# Altium PCB PCB2.PcbDoc
Units mil, origin at the board's own origin, x right, y up, seen from the top; angles counter-clockwise.
Board outline 1408.55 x 640 mil, 2 copper layers (Top Layer, Bottom Layer); 14 components, 18 nets, 83 pads, 26 vias.
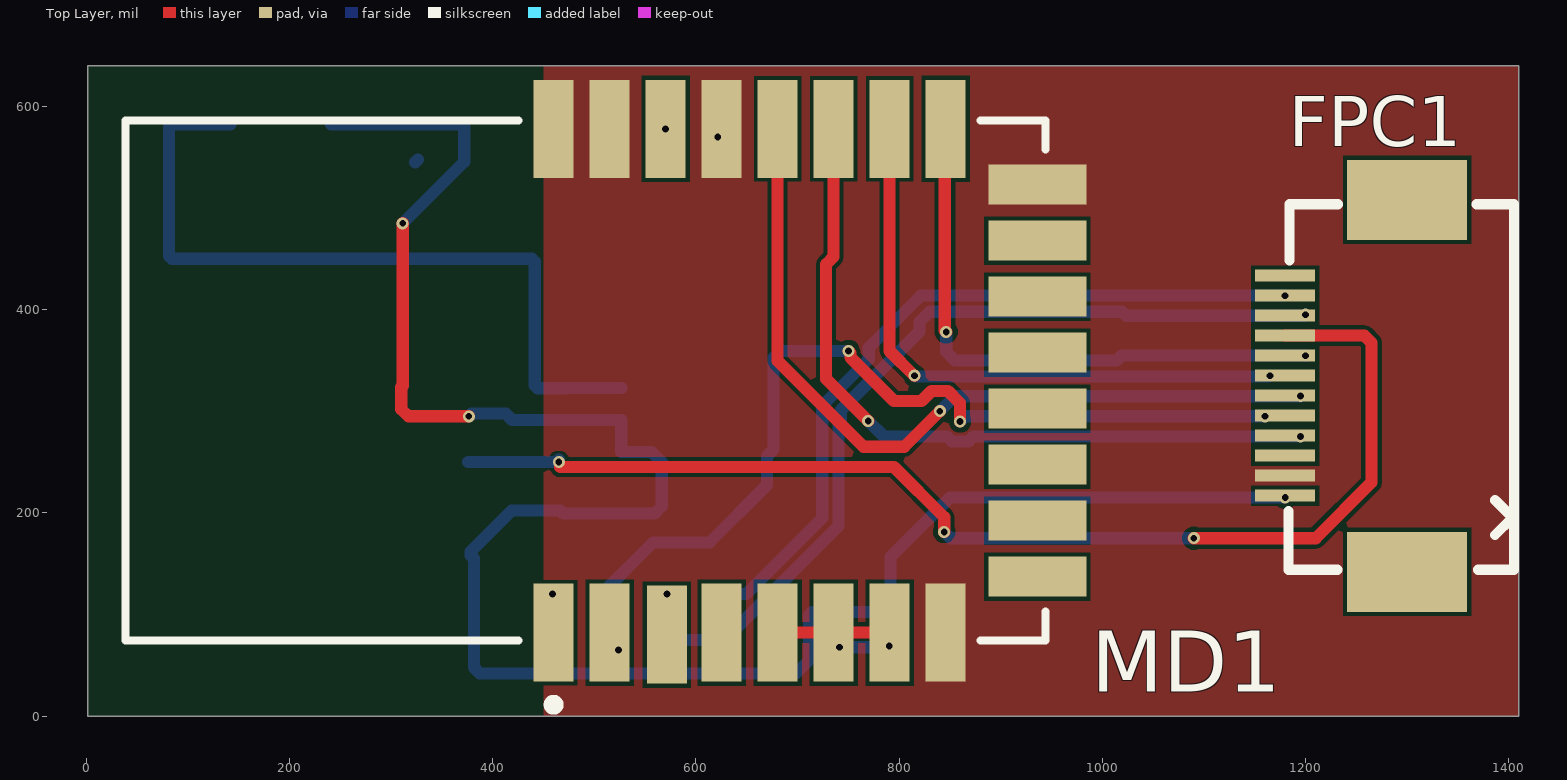
[diagram p0: Top Layer view]
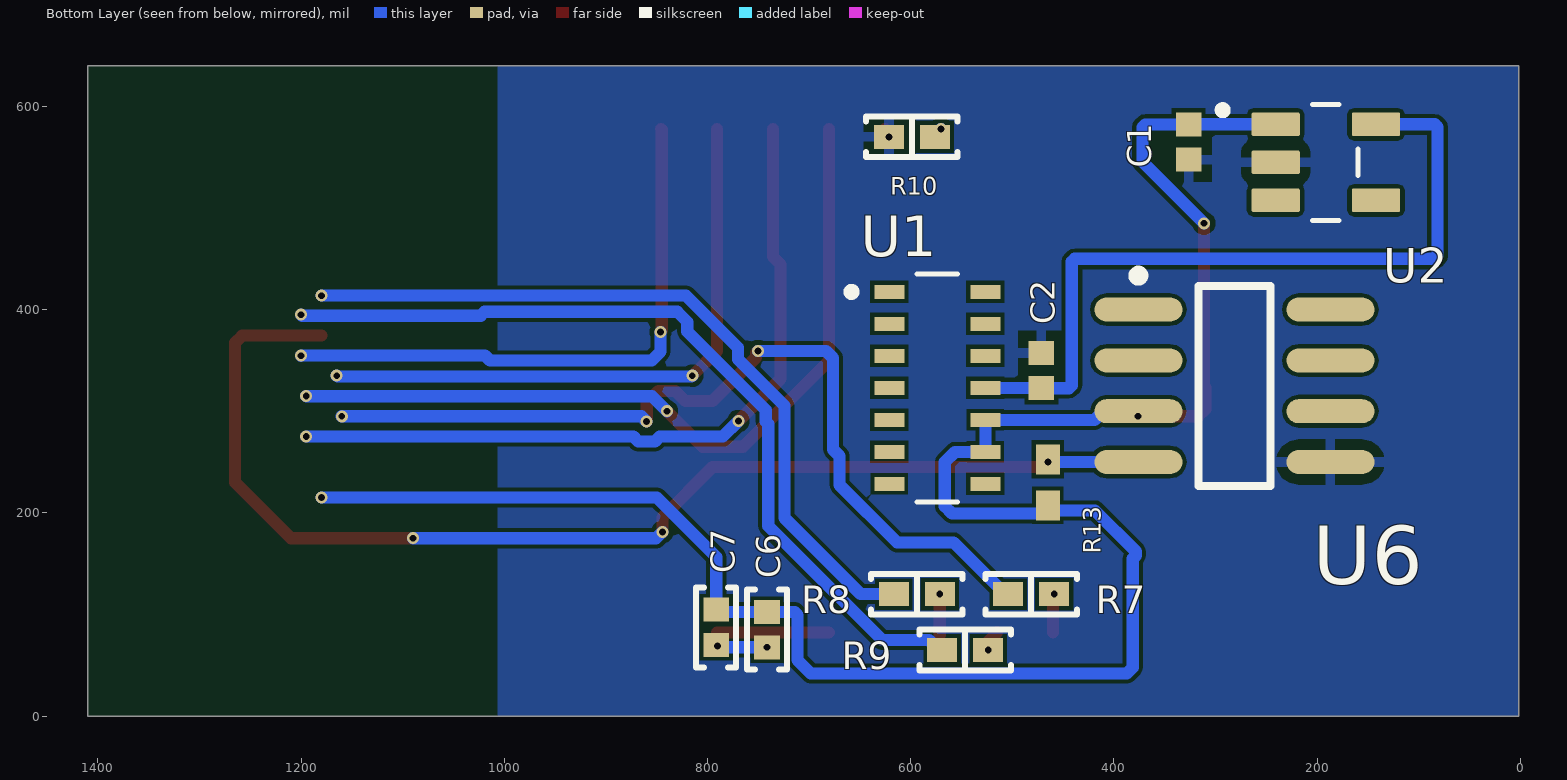
[diagram p1: Bottom Layer view, seen from below]

## Layer stack, top to bottom
Top Solder: solder mask 0.4, Solder Resist, Dk 3.5
Top Layer: signal copper 1.4
Dielectric 1: dielectric 12.6, FR-4, Dk 4.8
Bottom Layer: signal copper 1.4
Bottom Solder: solder mask 0.4, Solder Resist, Dk 3.5

## Board outline
1.45,0 1.45,640 1410,640 1410,0

## Design rules (kind name [scope] priority, off if disabled: settings)
Clearance [All] p1: gap=3.94 ignorepadtopadclearanceinfootprint=TRUE except(5.91: SMDPad-SMDPad SMDPad-THPad SMDPad-Via THPad-THPad THPad-Via Fill-Fill; 7.87: Arc-Via Arc-Hole Track-Via Track-Hole SMDPad-Hole THPad-Hole Via-Via Via-Hole Fill-Hole Poly-Hole Region-Hole Text-Hole; 11.02: Arc-THPad Track-THPad)
ComponentClearance [All] p1: gap=5.91 collisioncheckmode=3 verticalgap=5.91 showdistances=FALSE donotcheckwithout3dbody=TRUE
MinimumSolderMaskSliver [All] p1: minsoldermaskwidth=0
PolygonConnect PolygonConnect_7 [All vs IsNamedPolygon('3V3NRF_L03_P005')] p1: connectstyle=Direct reliefconductorwidth=10 reliefentries=4 polygonreliefangle="90 Angle" airgapwidth=10
PolygonConnect PolygonConnect_6 [All vs IsNamedPolygon('3V3MPU_L03_P006')] p2: connectstyle=Direct reliefconductorwidth=10 reliefentries=4 polygonreliefangle="90 Angle" airgapwidth=10
PolygonConnect PolygonConnect_5 [All vs IsNamedPolygon('3V3MCU_L03_P007')] p3: connectstyle=Direct reliefconductorwidth=10 reliefentries=4 polygonreliefangle="90 Angle" airgapwidth=10
PolygonConnect PolygonConnect_4 [All vs IsNamedPolygon('3V3GE_L03_P004')] p4: connectstyle=Direct reliefconductorwidth=10 reliefentries=4 polygonreliefangle="90 Angle" airgapwidth=10
PolygonConnect PolygonConnect_3 [All vs IsNamedPolygon('GND_L02_P003')] p5: connectstyle=Direct reliefconductorwidth=10 reliefentries=4 polygonreliefangle="90 Angle" airgapwidth=10
PolygonConnect PolygonConnect_2 [All vs IsNamedPolygon('GND_L04_P000')] p6: connectstyle=Direct reliefconductorwidth=10 reliefentries=4 polygonreliefangle="90 Angle" airgapwidth=10
PolygonConnect PolygonConnect_1 [All vs IsNamedPolygon('GND_L01_P001')] p7: connectstyle=Direct reliefconductorwidth=10 reliefentries=4 polygonreliefangle="90 Angle" airgapwidth=10
PolygonConnect [All] p8: connectstyle=Relief reliefconductorwidth=10 reliefentries=4 polygonreliefangle="90 Angle" airgapwidth=10
RoutingVias [All] p1: holewidth=7.87 width=15.75 viastyle="Through Hole" minholewidth=5.91 minwidth=10.63 maxholewidth=6.69 maxwidth=11.81
SilkToSolderMaskClearance [IsPad] p1: minsilkscreentomaskgap=0 clearancetoexposedcopper=FALSE
SolderMaskExpansion SolderMaskExpansion_Via [IsVia] p1: expansion=4 istentingtop=TRUE
Width [All] p1: maxlimit=12 minlimit=12 preferedwidth=12
27 further rules are at their usual default settings.

## Classes and differential pairs
net class N000-3_[0..2]: N000-3_0 N000-3_1 N000-3_2
net class N000-1_[0..1]: N000-1_0 N000-1_1
net class N000-2_[0..1]: N000-2_0 N000-2_1
net class N000-5_[0..1]: N000-5_0 N000-5_1
net class N000-4_[0..6]: N000-4_0 N000-4_1 N000-4_2 N000-4_3 N000-4_4 N000-4_5 N000-4_6
component class UWB3000: C6 C7 MD1 R7 R8 R9 R10
component class TEMP: R13 U6
component class MAX30102: C1 C2 U1
component class MAIN_PCB_CONNECTOR: FPC1

## Components (designator, comment, footprint, x,y, rotation, side; value= is the part's Value field where it differs from the comment)
C1 "10 µF" "CAP 0402_1005" 326.45,565 r90 bottom
C2 "10 µF" "CAP 0402_1005" 471.45,340 r270 bottom
C6 "0.1 µF" "CAP 0402_1005" 741.45,85 r90 bottom
C7 "10 µF" "CAP 0402_1005" 791.45,87.32 r90 bottom
FPC1 "FH12-12S-0.5SH(55)" FPC-SMD_FH12-12S-0.5SH-55 1240,325 r90 top
MD1 "DWM3000TR13" FP-DWM3000TR13-MFG 491.45,330 r90 top
R7 "470 Ohms" "RES 0402_1005" 481.45,120 r0 bottom
R8 "470 Ohms" "RES 0402_1005" 594.09,120 r0 bottom
R9 "470 Ohms" "RES 0402_1005" 546.45,65 r0 bottom
R10 "10 kOhms" "RES 0402_1005" 598.81,570 r180 bottom
R13 "4.7 kOhms" "RES 0402_1005" 465,230 r90 bottom
U1 "MAX30102EFD+T" XDCR_MAX30101EFD+ 573.69,322.99 r180 bottom locked
U2 "TPS70950DBVR" SOT95P280X145-5N 191.45,545 r180 bottom
U6 "DS18B20Z" MAXM-S8-2_N 281.45,325 r180 bottom

## Footprints (in the part's own frame and the unit in brackets; to place one, negate y for a bottom-side part, rotate by r counter-clockwise, add the part's x,y. Pads: shape width x height; smd on the part's side, far side on the other; paste and mask are expansions set on the pad)
"CAP 0402_1005" [mm] "Chip Capacitor, 2-Leads, Body 1.02x0.51mm, IPC Medium Density"
  rect 0.6x0.64 smd: 1(-0.44,0) 2(0.44,0)
  body extent -0.5,-0.26 0.5,0.26, height 0.52
FP-DWM3000TR13-MFG [mm]
  rect 2.45x1 smd paste+0 mask+0: 1(-6.295,0.8) 2(-6.295,-0.6) 3(-6.35,-2.032) 4(-6.295,-3.4) 5(-6.295,-4.8) 6(-6.295,-6.2) 7(-6.295,-7.6) 8(-6.295,-9) 17(6.295,-9) 18(6.295,-7.6) 19(6.295,-6.2) 20(6.295,-4.8) 21(6.295,-3.4) 22(6.295,-2) 23(6.295,-0.6) 24(6.295,0.8)
  rect 1x2.45 smd paste+0 mask+0: 9(-4.9,-11.295) 10(-3.5,-11.295) 11(-2.1,-11.295) 12(-0.7,-11.295) 13(0.7,-11.295) 14(2.1,-11.295) 15(3.5,-11.295) 16(4.9,-11.295)
  silkscreen extent -8.22,-11.5 6.5,11.5, body extent -7.62,-12.62 7.62,11.6, height 0.25
FPC-SMD_FH12-12S-0.5SH-55 [mm]
  rect 0.3x1.5 smd: 1(-2.746,1.527) 2(-2.245,1.527) 3(-1.746,1.527) 4(-1.245,1.527) 5(-0.746,1.527) 6(-0.245,1.527) 7(0.254,1.527) 8(0.755,1.527) 9(1.254,1.527) 10(1.755,1.527) 11(2.254,1.527) 12(2.754,1.527)
  rect 2x3 smd: 13(-4.65,-1.527) 14(4.65,-1.527)
  silkscreen extent -4.6,-4.2 4.54,1.44
MAXM-S8-2_N [mm] "SOIC, 8-Leads, Body 4.90x3.90mm, Pitch 1.27mm, IPC Medium Density"
  oval 2.2x0.6 smd: 1(-2.4,1.905) 2(-2.4,0.635) 3(-2.4,-0.635) 4(-2.4,-1.905) 5(2.4,-1.905) 6(2.4,-0.635) 7(2.4,0.635) 8(2.4,1.905)
  silkscreen extent -2.53,-2.5 0.9,2.88, body extent -2,-2.5 2,2.5, height 1.75
"RES 0402_1005" [mm] "Chip Resistor, 2-Leads, Body 1.0x0.5mm, IPC Medium Density"
  rect 0.75x0.6 smd: 1(-0.575,0) 2(0.575,0)
  silkscreen extent -1.14,-0.51 1.14,0.51, body extent -0.5,-0.25 0.5,0.25, height 0.35
SOT95P280X145-5N [mm]
  rrect15% 1.21x0.59 smd: 1(-1.255,0.95) 2(-1.255,0) 3(-1.255,-0.95) 4(1.255,-0.95) 5(1.255,0.95)
  silkscreen extent -2.68,-1.45 0.8,1.45
XDCR_MAX30101EFD+ [mm]
  rect 0.75x0.35 smd: 1(-1.2,2.4) 2(-1.2,1.6) 3(-1.2,0.8) 4(-1.2,0) 5(-1.2,-0.8) 6(-1.2,-1.6) 7(-1.2,-2.4) 8(1.2,-2.4) 9(1.2,-1.6) 10(1.2,-0.8) 11(1.2,0) 12(1.2,0.8) 13(1.2,1.6) 14(1.2,2.4)
  silkscreen extent -2.25,-2.85 0.51,2.85

## Part data
C1 C2 C7: library part 0402X106M6R3CT, "CAP CER 10UF 6.3V X5R 0402", Device Package="0402 (1005 Metric)", manufacturer="Walsin Technology Corporation", Operating Temperature="-55°C ~ 85°C", Supplier Part Number 1=1292-0402X106M6R3CT-ND, Temperature Coefficient=X5R, Tolerance=±20%, Voltage - Rated=6.3V, Applications="General Purpose", Capacitance="10 µF", componentlink1description=Datasheet, componentlink1url=https://www.passivecomponent.com/wp-content/uploads/datasheet/WTC_MLCC_General_Purpose.pdf, componentlink2description="DigiKey Link", componentlink2url=https://www.digikey.com/en/products/detail/walsin-technology-corporation/0402X106M6R3CT/14836858, lastupdated="2/9/2024 8:04:11 PM", Lifecycle Status=Active, Minimum Order=1, Mounting Type="Surface Mount, MLCC", Package / Case="0402 (1005 Metric)", packaging=TapeAndReel, Part Number=0402X106M6R3CT, Part Status=Active, partid=38921, Price=0.02, series=-, Size / Dimension="0.039\" L x 0.020\" W (1.00mm x 0.50mm)", Supplier 1=DigiKey, Thickness (Max)="0.028\" (0.70mm)"
C6: library part 0402B104J160CT, "CAP CER 0.1UF 16V X7R 0402", Device Package="0402 (1005 Metric)", manufacturer="Walsin Technology Corporation", Operating Temperature="-55°C ~ 125°C", Supplier Part Number 1=1292-1174-1-ND, Temperature Coefficient=X7R, Tolerance=±5%, Voltage - Rated=16V, Applications="General Purpose", Capacitance="0.1 µF", componentlink1description=Datasheet, componentlink1url=http://www.passivecomponent.com/wp-content/uploads/2018/10/MLCC.pdf, componentlink2description="DigiKey Link", componentlink2url=https://www.digikey.com/en/products/detail/walsin-technology-corporation/0402B104J160CT/9354672, lastupdated="2/9/2024 8:04:31 PM", Lifecycle Status=Active, Minimum Order=1, Mounting Type="Surface Mount, MLCC", Package / Case="0402 (1005 Metric)", packaging=TapeAndReel, Part Number=0402B104J160CT, Part Status=Active, partid=41146, Price=0.01, series=-, Size / Dimension="0.039\" L x 0.020\" W (1.00mm x 0.50mm)", Supplier 1=DigiKey, Thickness (Max)="0.022\" (0.55mm)"
FPC1: JLCPCB Part Class="Extended Part", LCSC Part Name="间距:0.5mm P数:12P 翻盖式 下接", manufacturer=HRS(广濑), Operating Temperature=-40℃~+85℃, Add into BOM=yes, Contact Material="Phosphor Bronze", Contact Plating=Gold, Contact Type="Bottom Contact", Convert to PCB=yes, Datasheet=https://item.szlcsc.com/datasheet/FH12-12S-0.5SH(55)/89539.html, Device=FH12-12S-0.5SH(55), FFC, FCB Thickness=0.3mm, Height Above Board=2mm, Locking Feature="Hinged Lid", Manufacturer Part=FH12-12S-0.5SH(55), Mounting Type="Surface Mount, Right Angle", Number of Contacts=12P, Pitch=0.5mm, Supplier=LCSC, Supplier Footprint=SMD,P=0.5mm,卧贴, Supplier Part=C88360, Symbol=FH12-12S-0.5SH(55)
MD1: library part CMP-231853-000002-1, "DWM3000 module Freq: 7.9872 GHz 6.8Mbps SPI 2.5-3.6V 8 GPIO's"
R7 R8 R9: library part TNPW0402470RBYEP, "RES 470 OHM 0.1% 1/16W 0402", Device Package="0402 (1005 Metric)", manufacturer="Vishay Dale", Operating Temperature="-55°C ~ 155°C", Power (Watts)="0.1W, 1/10W", Ratings=AEC-Q200, Supplier Device Package=0402, Supplier Part Number 1=541-9810-1-ND, Temperature Coefficient=±10ppm/°C, Tolerance=±0.1%, componentlink1description=Datasheet, componentlink1url=http://www.vishay.com/docs/28758/tnpw_e3.pdf, componentlink2description="DigiKey Link", componentlink2url=http://digikey.com/product-detail/en/vishay-dale/TNPW0402470RBYEP/541-9810-1-ND/9562435, Composition="Thin Film", Features="Anti-Sulfur, Automotive AEC-Q200, Moisture Resistant", Height - Seated (Max)="0.016\" (0.40mm)", lastupdated="2/9/2024 8:30:21 PM", Lifecycle Status=Active, Minimum Order=1, Number of Terminations=2, Package / Case="0402 (1005 Metric)", packaging=TapeAndReel, Part Number=TNPW0402470RBYEP, Part Status=Active, partid=3068, Price=0.27, Resistance="470 Ohms", series="TNPW e3", Size / Dimension="0.039\" L x 0.020\" W (1.00mm x 0.50mm)", Supplier 1=DigiKey
R10: library part RP73PF1E10KBTD, "RES 10K OHM 0.1% 1/10W 0402", Device Package="0402 (1005 Metric)", manufacturer="TE Connectivity Passive Product", Operating Temperature="-55°C ~ 155°C", Power (Watts)="0.1W, 1/10W", Supplier Device Package=0402, Supplier Part Number 1=A127415CT-ND, Temperature Coefficient=±25ppm/°C, Tolerance=±0.1%, componentlink1description=Datasheet, componentlink1url=https://www.te.com/commerce/DocumentDelivery/DDEController?Action=srchrtrv&DocNm=1773272&DocType=DS&DocLang=English, componentlink2description="DigiKey Link", componentlink2url=https://www.digikey.com/en/products/detail/te-connectivity-passive-product/RP73PF1E10KBTD/8260957, Composition="Thin Film", Height - Seated (Max)="0.014\" (0.35mm)", lastupdated="2/9/2024 8:30:24 PM", Lifecycle Status=Active, Minimum Order=1, Number of Terminations=2, Package / Case="0402 (1005 Metric)", packaging=TapeAndReel, Part Number=RP73PF1E10KBTD, Part Status=Active, partid=2434, Price=0.08, Resistance="10 kOhms", series="RP73, Holsworthy", Size / Dimension="0.039\" L x 0.020\" W (1.00mm x 0.50mm)", Supplier 1=DigiKey
R13: library part RR0510P-472-D, "RES SMD 4.7K OHM 0.5% 1/16W 0402", Device Package="0402 (1005 Metric)", manufacturer=Susumu, Operating Temperature="-55°C ~ 125°C", Power (Watts)="0.063W, 1/16W", Supplier Part Number 1=RR05P4.7KDCT-ND, Temperature Coefficient=±25ppm/°C, Tolerance=±0.5%, componentlink1description=Datasheet, componentlink1url=http://www.susumu.co.jp/common/pdf/n_catalog_partition05_en.pdf, componentlink2description="DigiKey Link", componentlink2url=https://www.digikey.com/en/products/detail/susumu/RR0510P-472-D/432413, Composition="Thin Film", Height - Seated (Max)="0.016\" (0.40mm)", lastupdated="2/9/2024 8:30:21 PM", Lifecycle Status=Active, Minimum Order=1, Number of Terminations=2, Package / Case="0402 (1005 Metric)", packaging=TapeAndReel, Part Number=RR0510P-472-D, Part Status=Active, partid=3209, Price=0.01, Resistance="4.7 kOhms", series=RR, Size / Dimension="0.039\" L x 0.020\" W (1.00mm x 0.50mm)", Supplier 1=DigiKey
U1: "Pulse Oximeter and Heart Rate Sensor Digital Output", Package=None, Check_prices=https://www.snapeda.com/parts/MAX30102EFD+T/Maxim+Integrated/view-part/?ref=eda, Digi-Key_Part_Number=MAX30102EFD+TTR-ND, MF="Maxim Integrated Products", MP=MAX30102EFD+T, Purchase-URL=https://pricing.snapeda.com/search/part/MAX30102EFD+T/?ref=eda, SnapEDA_Link=https://www.snapeda.com/parts/MAX30102EFD+T/Maxim+Integrated/view-part/?ref=snap
U2: Package=None, Availability=Unavailable, MF="{'manufacturer': u'Texas Instruments'}", MP=TPS70950DBVR, Price=None
U6: library part CMP-0253-00023-2, "High-Precision 1-Wire Digital Thermometer, -55 to 125 degC, 8-Pin SOIC (S8-2)", Generic Part Number=DS18B20, Temp. Thresh.="Programmable (NV)", Code_JEDEC=MS012, componentlink1description="Manufacturer URL", componentlink1url=http://www.maximintegrated.com/, componentlink2description=Datasheet, componentlink2url=http://datasheets.maximintegrated.com/en/ds/DS18B20.pdf, ComponentLink3Description="Package Specification", ComponentLink3URL=http://pdfserv.maximintegrated.com/package_dwgs/21-0041.PDF, DatasheetVersion="Rev. 4", Interface=1-Wire, Mounting Technology="Surface Mount", Multi Droppable=Yes, PackageDescription="8-Pin Small-Outline IC, Narrow (0.15in) (S8-2), Body 4.90 x 3.90 mm, Pitch 1.27 mm", PackageReference=S8-2, PackageVersion="Rev. D, 10/2012", Parasite Pwr.=Yes, PartNumber=DS18B20Z, Sensor Type=Local

## Via types
v1: diameter 11.81, hole 6.69, Top Layer to Bottom Layer, tented both sides, 26 vias

## Nets (pads, with @x,y where several pads share a name; then routed paths per layer and width w, separated by ;. In a path a pad name is that pad's centre, name@x,y a point inside that pad or via, vN(x,y) a via of type N, cw(c..) or ccw(c..) an arc to the next point about the centre after c; other vN are vias at no path point)
1V8: C2.2 U1.11 U2.5 | length 759
  Bottom Layer w12: U2.5 84.22,582.4 81.45,579.63 81.45,452.77 84.22,450 438.68,450 441.45,447.23 441.45,325.44 444.22,322.68 C2.2 471.77,322.99 U1.11
3v3: C1.2 C6.2 C7.2 FPC1.1 R13.1 U1.9 U1.10 U2.1 U6.3 | length 2031.2
  Top Layer w12: v1(311.45,485) 311.45,325 310,323.55 310,302.03 317.03,295 v1(376.45,295)
  Bottom Layer w12: U2.1 326.37,582.4 C1.2 369.13,582.32 371.91,579.54 371.91,545.46 v1(311.45,485) ; v1(376.45,295) 379.23,297.78 412.8,297.78 419.08,291.5 U1.10 U1.9 556.45,260 566.45,250 566.45,206.44 559.42,199.41 469.4,199.41 466.45,202.36 418.81,202.36 378.41,161.96 378.41,158.04 381.45,155 381.45,47.77 387.33,41.89 698.34,41.89 711.45,55 711.45,99.56 714.22,102.32 C6.2 789.13,102.32 C7.2 791.45,156.45 850,215 v1(1180,215)
DW_EXTON: FPC1.5 R7.2 | length 876.6
  Top Layer w12: v1(750.26,359.36) 752.24,357.38 752.24,352.76 795,310 822.03,310 831.81,319.78 848.19,319.78 859.78,308.19 859.78,290.22 v1(860,290)
  Bottom Layer w12: R7.2 507.04,120 557.98,170.94 613.54,170.94 670,227.39 670,255.86 676.45,262.31 676.45,352.33 683.48,359.36 v1(750.26,359.36) ; v1(860,290) 865,295 v1(1160,295)
DW_MISO: FPC1.4 MD1.19 | length 743.4
  Top Layer w12: MD1.19 735.54,451.99 728.18,444.63 728.18,331.82 v1(769.62,290.38)
  Bottom Layer w12: v1(769.62,290.38) 785,275 847.03,275 851.81,270.22 868.19,270.22 872.97,275 v1(1195,275)
DW_MOSI: FPC1.7 MD1.18 | length 603.7
  Top Layer w12: MD1.18 790.66,359.34 v1(815,335)
  Bottom Layer w12: v1(815,335) 815.94,334.06 1164.06,334.06 v1(1165,335)
DW_RST: FPC1.11 R8.2 | length 756.3
  Bottom Layer w12: R8.2 649.49,120 724.33,194.84 724.33,305.46 770.04,351.16 770.04,362.58 821.22,413.76 v1(1179.88,413.76)
DW_SPI_CLK: FPC1.6 MD1.20 | length 798.6
  Top Layer w12: MD1.20 680.43,349.57 765,265 805,265 v1(840,300)
  Bottom Layer w12: v1(840,300) 854.78,314.78 1194.78,314.78 v1(1195,315)
DW_SPI_CS: FPC1.8 MD1.17 | length 579.4
  Top Layer w12: MD1.17 845,577.05 845,379.39 v1(846.36,378.04)
  Bottom Layer w12: v1(846.36,378.04) 846.36,358.64 855,350 1014.13,350 1018.92,354.79 1199.81,354.79 v1(1200,354.61)
DW_WAKEUP: FPC1.10 R9.2 | length 841.8
  Bottom Layer w12: R9.2 572.04,65 581.91,74.87 628.14,74.87 740.27,187 740.27,287.44 742.7,289.87 742.7,301.29 820,378.59 820,387.97 829.85,397.82 1019.45,397.82 1023.29,393.98 1198.98,393.98 v1(1200,395)
GND: C1.1 C2.1 FPC1.2 MD1.8 MD1.16 MD1.21 MD1.23 MD1.24 R10.1 U2.2 U6.5 | length 13.2
  Top Layer w12: v1(621.45,570) 625.31,573.86 MD1.21
  Bottom Layer w12: C1.1@323.77,545 C1.1
MAXS_SCL: U1.2
MAXS_SDA: U1.3
NetC6_1: C6.1 C7.1 MD1.5 MD1.6 MD1.7 | length 161.2
  Top Layer w12: MD1.5 MD1.6 MD1.7
  Bottom Layer w12: v1(741.45,67.68) 789.13,67.68 v1(790.29,68.84) C7.1
NetMD1_1: MD1.1 R7.1 | length 38.3
  Top Layer w12: v1(458.81,120) 459.95,118.86 MD1.1
NetMD1_2: MD1.2 R9.1 | length 25.8
  Top Layer w12: MD1.2 523.81,73.43 MD1.2@523.81,60
  other v1: 523.81,65
NetMD1_3: MD1.3 R8.1 | length 40
  Top Layer w12: MD1.3 v1(571.45,120)
NetMD1_22: MD1.22 R10.2 | length 10.3
  Bottom Layer w12: v1(570.19,577.83) 576.17,571.85 R10.2
TEMP: FPC1.9 R13.2 U6.4 | length 1178.2
  Top Layer w12: v1@466.45,245 795,245 844.4,195.6 v1(844.4,181.27) ; v1(1090,175) 1210,175 1265,230 1265,367.36 1257.97,374.38 FPC1.9
  Bottom Layer w12: U6.4 464.09,250 R13.2@466.45,247.64 ; v1(465,250) R13.2 ; v1(844.4,181.27) 850.67,175 v1(1090,175)
pads on no net: FPC1.3 FPC1.12 FPC1.13 FPC1.14 MD1.4 MD1.9 MD1.10 MD1.11 MD1.12 MD1.13 MD1.14 MD1.15 U1.1 U1.4 U1.5 U1.6 U1.7 U1.8 U1.12 U1.13 U1.14 U2.3 U2.4 U6.1 U6.2 U6.6 U6.7 U6.8

## Polygon pours and split planes (outlines as drawn)
GND on Bottom Layer "GND_L02_P000" (solid, pour order 0): 1.45,640 1006.45,640 1006.45,0 1.45,0
GND on Top Layer "GND_L01_P001" (solid, pour order 1): 450,640 450,0 1410,0 1410,640